# Altium PCB PC110.PcbDoc (part 2 of 24)
Units mm, origin at the board's own origin, x right, y up, seen from the top; angles counter-clockwise.
Board outline 150.05 x 107.35 mm, 10 copper layers (In2.Cu, F.Cu, B.Cu, In1.Cu, In3.Cu, In4.Cu, In5.Cu, In6.Cu, In7.Cu, In8.Cu); 936 components, 1434 nets, 4891 pads, 6088 vias.
Unrouted connection lines stored in the file: 2995.
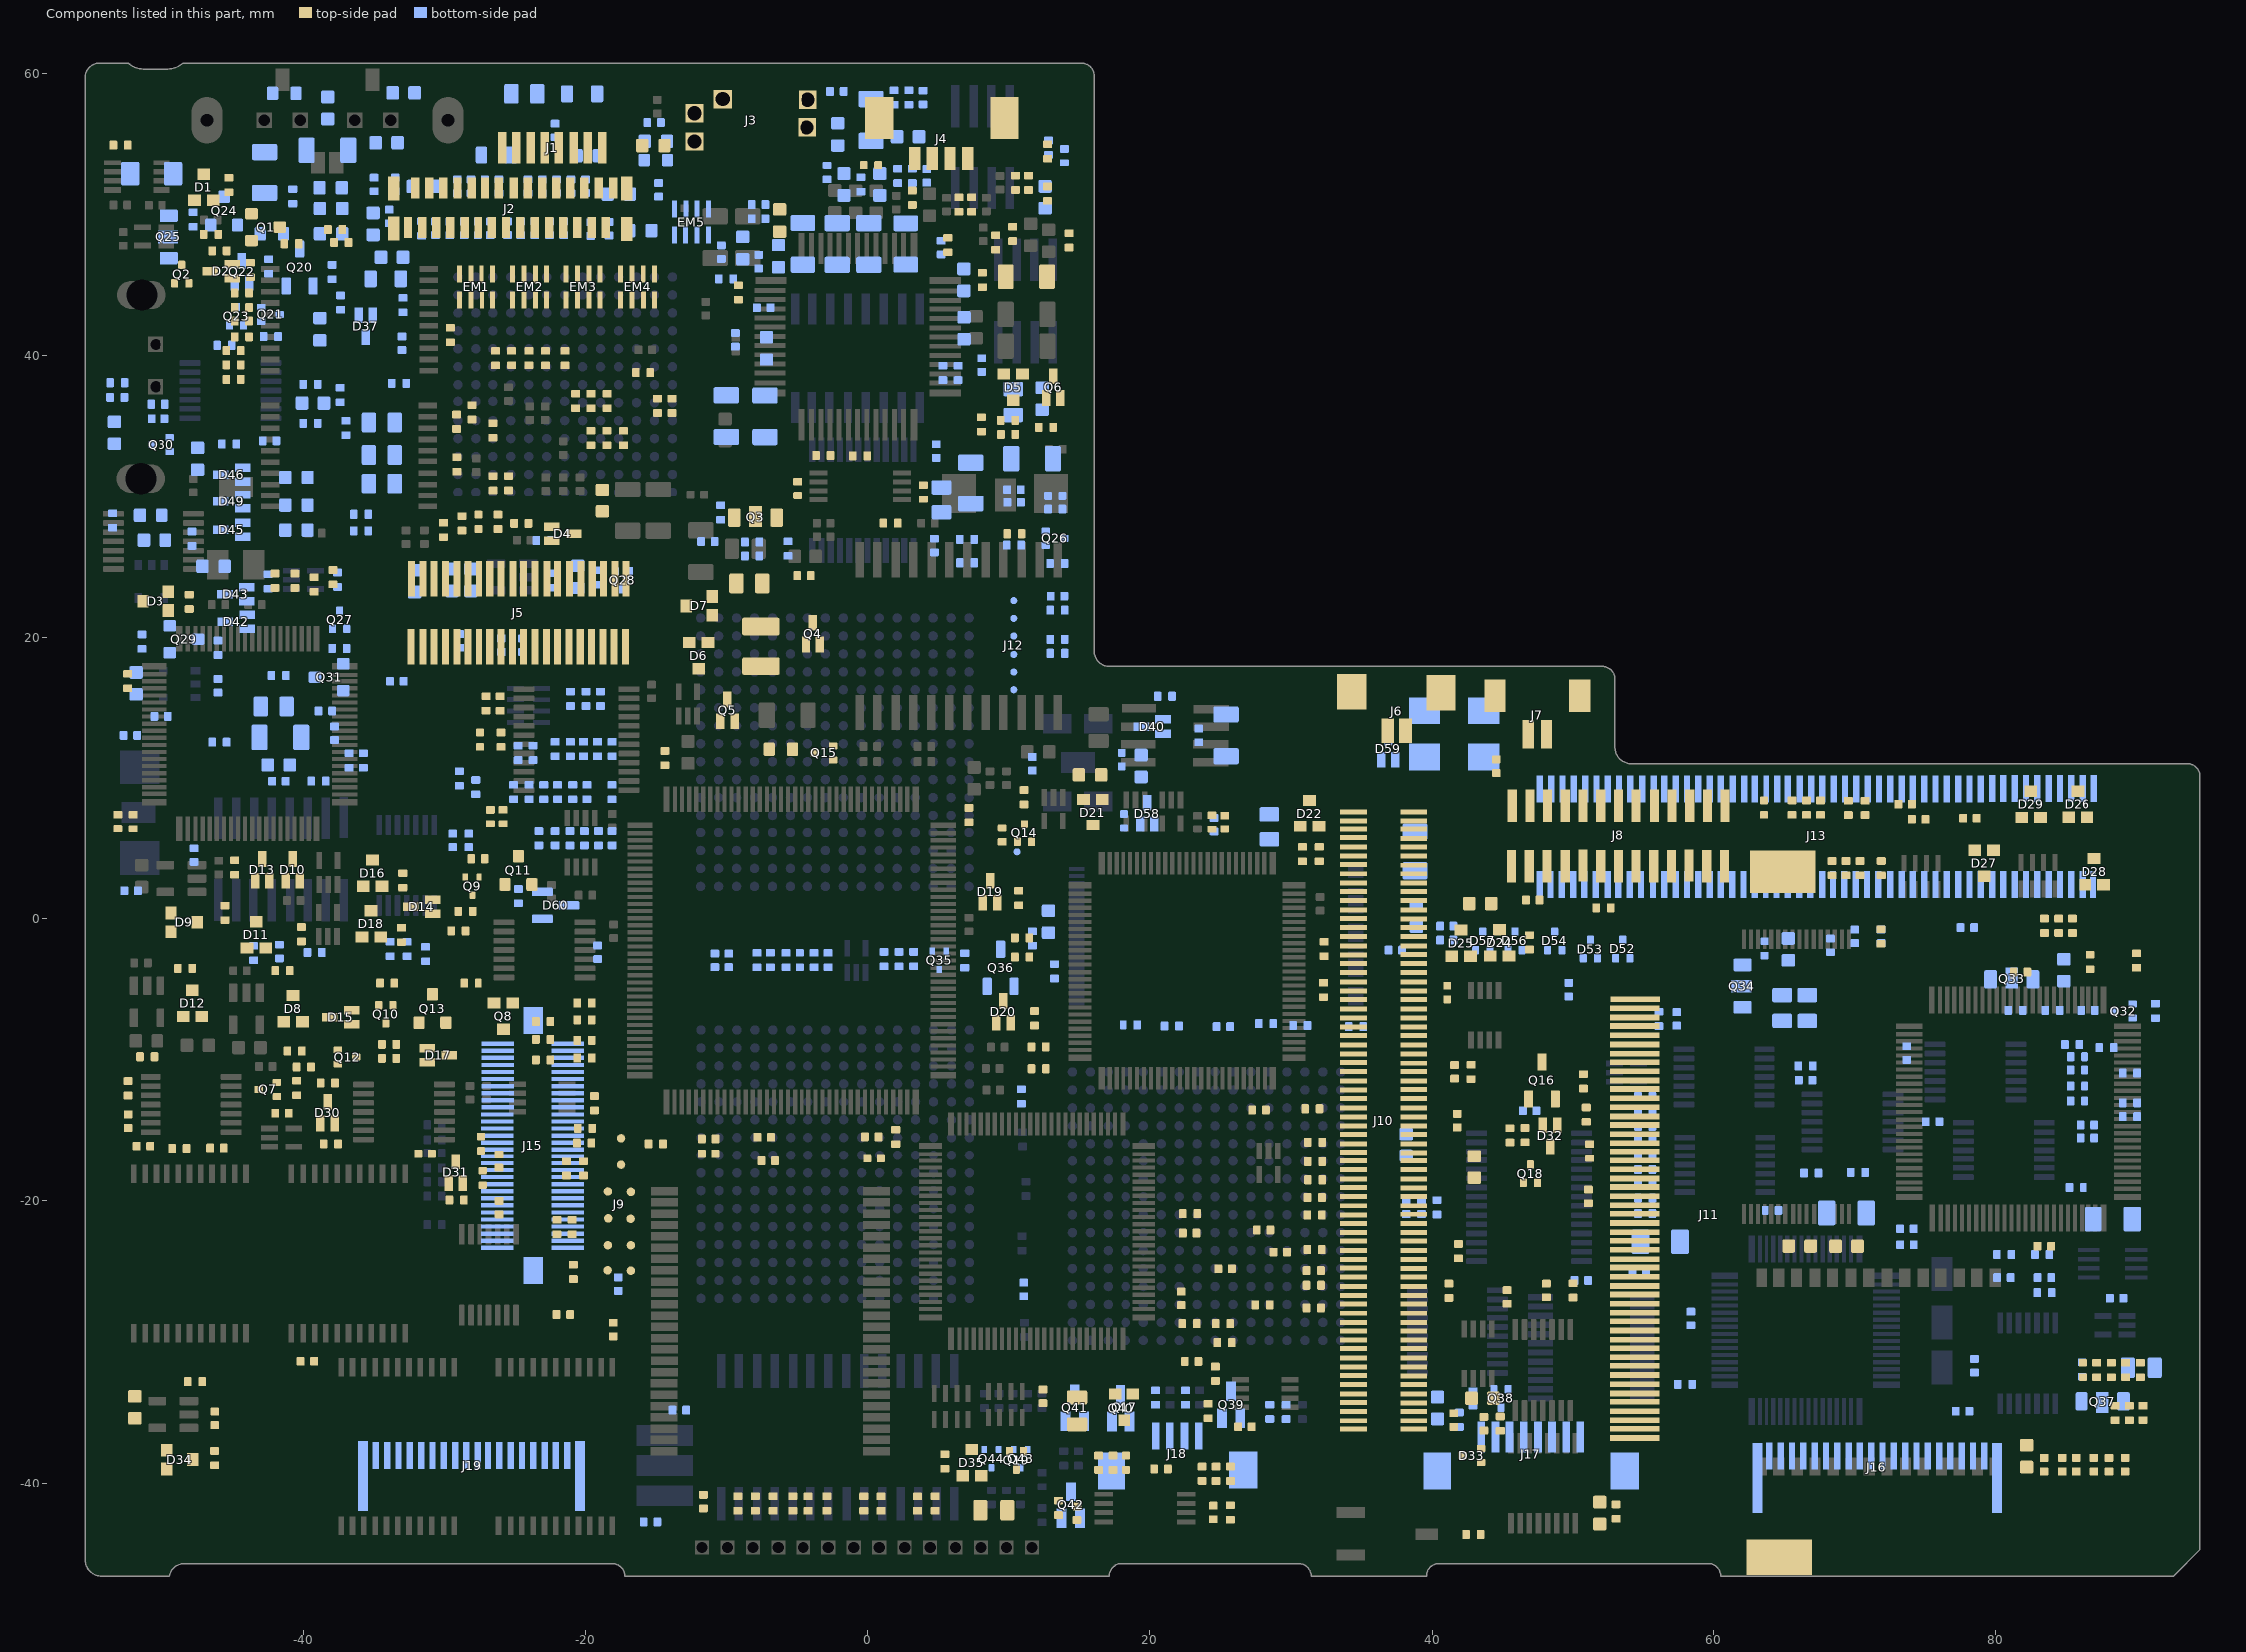
[diagram p10: the components of this part, seen from the top]

## Components (designator, comment, footprint, x,y, rotation, side; value= is the part's Value field where it differs from the comment) (continued)
C85 "Comment" C_0402_1005Metric#1 25.33,6.89 r90 top value=1nF
C86 "Comment" C_0402_1005Metric#1 47.19,1.34 r0 top value=180nF
C87 "Comment" C_0402_1005Metric#1 41.66,-10.81 r90 top value=120nF
C88 "Comment" C_0402_1005Metric#1 44.61,10.87 r90 top value=180nF
C89 "Comment" C_0603_1608Metric#1 43.47,1.09 r0 top value=470nF
C90 "Comment" C_0402_1005Metric#1 41.11,-5.2 r90 top value=120nF
C91 "Comment" C_0402_1005Metric#1 73.59,8.19 r0 top value=100nF
C92 "Comment" C_0402_1005Metric#1 74.55,7.12 r0 top value=120nF
C93 "Comment" C_0402_1005Metric#1 78.17,7.19 r0 top value=100nF
C94 "Comment" C_0402_1005Metric#1 81.75,-3.75 r0 top value=100nF
C95 "Comment" C_0402_1005Metric#1 -51.41,-16.07 r0 top value=150nF
C96 "Comment" C_0402_1005Metric#1 -41.54,-13.73 r0 top value=150nF
C97 "Comment" C_0402_1005Metric#1 -46.29,-35.38 r90 top value=100nF
C98 "Comment" C_0402_1005Metric#1 -46.14,-16.2 r0 top value=330pF
C99 "Comment" C_0402_1005Metric#1 -52.49,-14.3 r90 top value=100pF
C100 "Comment" C_0603_1608Metric#1 -52.02,-34.6 r90 top value=10nF
C101 "Comment" C_0402_1005Metric#1 -39.75,-31.35 r0 top value=180nF
C102 "Comment" C_0402_1005Metric#1 -26.13,-17.17 r90 top value=120nF
C103 "Comment" C_0402_1005Metric#1 -18.05,-29.1 r90 top value=150nF
C104 "Comment" C_0402_1005Metric#1 -26.12,-20.48 r90 top value=150nF
C105 "Comment" C_0402_1005Metric#1 -31.42,-16.63 r0 top value=150nF
C106 "Comment" C_0402_1005Metric#1 -21.57,-28.04 r0 top value=1nF
C107 "Comment" C_0402_1005Metric#1 0.47,-16.96 r0 top value=1nF
C108 "Comment" C_0402_1005Metric#1 -11.3,-16.64 r0 top value=150nF
C109 "Comment" C_0402_1005Metric#1 -11.3,-15.56 r0 top value=180nF
C110 "Comment" C_0402_1005Metric#1 -7.37,-15.44 r0 top value=1nF
C111 "Comment" C_0402_1005Metric#1 12.41,-33.83 r90 top value=1nF
C112 "Comment" C_0402_1005Metric#1 0.3,-15.41 r0 top value=150nF
C113 "Comment" C_0402_1005Metric#1 -7.09,-17.15 r0 top value=120nF
C114 "Comment" C_0402_1005Metric#1 25.36,-24.81 r180 top value=100nF
C115 "Comment" C_0402_1005Metric#1 22.99,-31.36 r180 top value=100nF
C116 "Comment" C_0402_1005Metric#1 29.26,-23.63 r180 top value=100nF
C117 "Comment" C_0402_1005Metric#1 22.85,-22.28 r180 top value=100nF
C118 "Comment" C_0805_2012Metric#1 14.82,-34.86 r90 top value=2.7uF
C119 "Comment" C_0402_1005Metric#1 28.08,-22.06 r180 top value=100nF
C120 "Comment" C_0402_1005Metric#1 27.76,-13.51 r180 top value=100nF
C121 "Comment" C_0402_1005Metric#1 26.76,-35.97 r0 top value=100nF
C122 "Comment" C_0402_1005Metric#1 22.26,-26.9 r90 top value=100nF
C123 "Comment" C_0402_1005Metric#1 43.73,-35.76 r90 top value=150nF
C124 "Comment" C_0603_1608Metric#1 43.05,-17.59 r90 top value=150nF
C125 "Comment" C_0402_1005Metric#1 41.6,-35.5 r90 top value=1nF
C126 "Comment" C_0402_1005Metric#1 41.84,-14.26 r90 top value=150nF
C127 "Comment" C_0402_1005Metric#1 45.37,-26.8 r90 top value=100nF
C128 "Comment" C_0402_1005Metric#1 48.15,-26.34 r90 top value=150nF
C129 "Comment" C_0402_1005Metric#1 51.12,-19.69 r90 top value=100nF
C130 "Comment" C_0603_1608Metric#1 43.63,-33.96 r0 top value=1uF
C131 "Comment" C_0603_1608Metric#1 82.18,-38.05 r90 top value=10nF
C132 "Comment" C_0603_1608Metric#1 69.445,-23.21 r0 top value=100nF
C133 "Comment" C_0402_1005Metric#1 83.43,-23.21 r0 top value=100nF
C134 "Comment" C_0603_1608Metric#1 66.13,-23.2 r0 top value=150nF
C135 "Comment" C_0805_2012Metric#1 8.94,-41.95 r0 top value=2.7uF
C136 "Comment" C_0402_1005Metric#1 -11.67,-41.34 r90 top value=150nF
C137 "Comment" C_0402_1005Metric#1 14.81,-42.16 r90 top value=1nF
C138 "Comment" C_0402_1005Metric#1 24.53,-42.11 r90 top value=1nF
C139 "Comment" C_0402_1005Metric#1 20.83,-38.96 r0 top value=100nF
C140 "Comment" C_0603_1608Metric#1 51.93,-42.15 r90 top value=1uF
C141 "Comment" C_0402_1005Metric#1 83.42,-38.66 r90 top value=100nF
C142 "Comment" C_0402_1005Metric#1 85.69,-38.66 r90 top value=150nF
C143 "Comment" C_0402_1005Metric#1 88.07,-38.66 r90 top value=150nF
C144 "Comment" C_0402_1005Metric#1 87,-38.66 r90 top value=100pF
C145 "Comment" C_0402_1005Metric#1 84.7,-38.66 r90 top value=100pF
C146 "Comment" C_0402_1005Metric#1 89.22,-38.66 r90 top value=100nF
C147 "Comment" C_0603_1608Metric#2 12.56,51.17 r270 bottom value=1uF
C148 "Comment" C_0402_1005Metric#2 -10.4,47.3 r270 bottom value=DNP
C149 "Comment" C_0402_1005Metric#2 8.09,39.31 r270 bottom value=100nF
C150 "Comment" C_0603_1608Metric#2 -1.66,52.08 r270 bottom value=10nF
C151 "Comment" C_0402_1005Metric#2 4.2,52.69 r270 bottom value=150nF
C152 "Comment" C_1206_3216Metric#2 -2.14,47.87 r270 bottom value=10uF
C153 "Comment" C_0603_1608Metric#2 6.82,45.33 r270 bottom value=1uF
C154 "Comment" C_0402_1005Metric#2 3.93,58.3 r270 bottom value=100pF
C155 "Comment" C_0402_1005Metric#2 5.21,47.62 r270 bottom value=150nF
C156 "Comment" C_0402_1005Metric#2 -9.41,41.09 r270 bottom value=100nF
C157 "Comment" C_0402_1005Metric#2 -7.41,43.37 r0 bottom value=150nF
C158 "Comment" C_0603_1608Metric#2 6.83,41.92 r270 bottom value=1uF
C159 "Comment" C_0402_1005Metric#2 -7.76,46.62 r270 bottom value=DNP
C160 "Comment" C_1206_3216Metric#2 -4.6,47.88 r270 bottom value=10uF
C161 "Comment" C_1206_3216Metric#2 0.1,47.87 r270 bottom value=10uF
C162 "Comment" C_1206_3216Metric#2 0.25,56.71 r270 bottom value=10uF
C163 "Comment" C_0402_1005Metric#2 -7.77,50.66 r0 bottom value=220pF
C164 "Comment" C_0603_1608Metric#2 2.87,55.53 r0 bottom value=330nF
C165 "Comment" C_0402_1005Metric#2 -2.16,58.73 r0 bottom value=DNP
C166 "Comment" C_0603_1608Metric#2 0.88,52.08 r270 bottom value=300nF
C167 "Comment" C_0402_1005Metric#2 -7.77,49.65 r0 bottom value=220pF
C168 "Comment" C_0603_1608Metric#2 -34.14,55.1 r0 bottom value=1uF
C169 "Comment" C_0402_1005Metric#2 -25.52,48.98 r270 bottom value=56pF
C170 "Comment" C_0402_1005Metric#2 -14.84,51.7 r90 bottom value=220pF
C171 "Comment" C_0402_1005Metric#2 -29.14,51.95 r270 bottom value=56pF
C172 "Comment" C_0402_1005Metric#2 -33.06,40.85 r90 bottom value=100nF
C173 "Comment" C_0402_1005Metric#2 -29.68,48.98 r270 bottom value=56pF
C174 "Comment" C_0402_1005Metric#2 -21.04,51.95 r270 bottom value=56pF
C175 "Comment" C_0402_1005Metric#2 -22.05,51.95 r270 bottom value=56pF
C176 "Comment" C_0603_1608Metric#2 -33.76,46.93 r0 bottom value=470nF
C177 "Comment" C_0402_1005Metric#2 -19.64,48.93 r90 bottom value=56pF
C178 "Comment" C_0402_1005Metric#2 -21.55,48.98 r270 bottom value=56pF
C179 "Comment" C_0402_1005Metric#2 -33.96,49.82 r270 bottom value=1nF
C180 "Comment" C_0402_1005Metric#2 -24.59,48.98 r270 bottom value=56pF
C181 "Comment" C_0402_1005Metric#2 -27.67,48.98 r270 bottom value=56pF
C182 "Comment" C_0402_1005Metric#2 -24.08,51.95 r270 bottom value=56pF
C183 "Comment" C_0402_1005Metric#2 -28.66,48.98 r270 bottom value=56pF
C184 "Comment" C_0402_1005Metric#2 -26.74,48.98 r270 bottom value=56pF
C185 "Comment" C_0402_1005Metric#2 -26.13,51.95 r270 bottom value=56pF
C186 "Comment" C_0402_1005Metric#2 -23.06,51.95 r270 bottom value=56pF
C187 "Comment" C_0402_1005Metric#2 -23.59,48.98 r270 bottom value=56pF
C188 "Comment" C_0402_1005Metric#2 -33.53,52.09 r270 bottom value=1nF
C189 "Comment" C_0402_1005Metric#2 -35.03,52.08 r270 bottom value=100nF
C190 "Comment" C_0603_1608Metric#2 -35.1,49.29 r270 bottom value=10nF
C191 "Comment" C_0402_1005Metric#2 -27.13,51.95 r270 bottom value=56pF
C192 "Comment" C_0402_1005Metric#2 -20.01,51.95 r270 bottom value=56pF
C193 "Comment" C_0402_1005Metric#2 -30.69,48.98 r270 bottom value=56pF
C194 "Comment" C_0402_1005Metric#2 -28.17,51.95 r270 bottom value=56pF
C195 "Comment" C_0402_1005Metric#2 -18.34,48.95 r90 bottom value=56pF
C196 "Comment" C_0402_1005Metric#2 -22.55,48.98 r270 bottom value=56pF
C197 "Comment" C_0603_1608Metric#2 -32.94,58.63 r0 bottom value=300nF
C198 "Comment" C_0402_1005Metric#2 -22.16,55.97 r90 bottom value=120nF
C199 "Comment" C_0402_1005Metric#2 -15.16,56.53 r0 bottom value=220pF
C200 "Comment" C_1206_3216Metric#2 -42.77,52.96 r270 bottom value=10uF
C201 "Comment" C_1206_3216Metric#2 -38.33,54.57 r0 bottom value=10uF
C202 "Comment" C_0603_1608Metric#2 -38.3,57.56 r270 bottom value=150nF
C203 "Comment" C_0402_1005Metric#2 23.5,13.05 r90 bottom value=150nF
C204 "Comment" C_1206_3216Metric#2 25.43,13.05 r90 bottom value=10uF
C205 "Comment" C_0402_1005Metric#2 13.44,22.9 r0 bottom value=150nF
C206 "Comment" C_1206_3216Metric#2 -7.32,35.69 r270 bottom value=10uF
C207 "Comment" C_0603_1608Metric#2 12.35,36.93 r270 bottom value=300nF
C208 "Comment" C_0402_1005Metric#2 10.36,30.5 r0 bottom value=1nF
C209 "Comment" C_1206_3216Metric#2 11.64,32.69 r0 bottom value=10uF
C210 "Comment" C_1206_3216Metric#2 -10.05,35.7 r270 bottom value=10uF
C211 "Comment" C_0402_1005Metric#2 10.37,29.54 r0 bottom value=150nF
C212 "Comment" C_0402_1005Metric#2 -11.35,26.76 r0 bottom value=150nF
C213 "Comment" C_0402_1005Metric#2 4.86,33.23 r90 bottom value=100nF
C214 "Comment" C_1206_3216Metric#2 7.31,30.93 r90 bottom value=10uF
C215 "Comment" C_0402_1005Metric#2 4.74,26.48 r270 bottom value=100nF
C216 "Comment" C_0402_1005Metric#2 -24.46,19.43 r90 bottom value=150nF
C217 "Comment" C_0402_1005Metric#2 -28.97,19.73 r90 bottom value=150nF
C218 "Comment" C_0603_1608Metric#2 -32.16,23.96 r270 bottom value=150nF
C219 "Comment" C_0402_1005Metric#2 -25.96,19.43 r90 bottom value=150nF
C220 "Comment" C_0402_1005Metric#2 -33.42,16.88 r0 bottom value=150nF
C221 "Comment" C_0603_1608Metric#2 -29.51,24.04 r270 bottom value=150nF
C222 "Comment" C_0603_1608Metric#2 -28.18,24.04 r270 bottom value=10nF
C223 "Comment" C_0402_1005Metric#2 -37.83,13.21 r270 bottom value=150nF
C224 "Comment" C_0603_1608Metric#2 -50.6,26.86 r0 bottom value=10nF
C225 "Comment" C_0603_1608Metric#2 -47.51,32.68 r90 bottom value=1uF
C226 "Comment" C_0603_1608Metric#2 -53.46,34.52 r90 bottom value=1uF
C227 "Comment" C_0402_1005Metric#2 -38.47,14.78 r0 bottom value=150nF
C228 "Comment" C_0402_1005Metric#2 -50.34,35.51 r0 bottom value=100pF
C229 "Comment" C_0603_1608Metric#2 -39.35,36.62 r0 bottom value=1uF
C230 "Comment" C_0402_1005Metric#2 -52.33,13.05 r180 bottom value=DNP
C231 "Comment" C_0402_1005Metric#2 -42.42,33.95 r0 bottom value=150nF
C232 "Comment" C_1206_3216Metric#2 -41.65,12.91 r0 bottom value=10uF
C233 "Comment" C_0603_1608Metric#2 -51.93,16.73 r90 bottom value=330nF
C234 "Comment" C_0402_1005Metric#2 -46.07,16.56 r270 bottom value=150nF
C235 "Comment" C_0402_1005Metric#2 70.03,-1.23 r270 bottom value=150nF
C236 "Comment" C_0402_1005Metric#2 73.7,-9.48 r90 bottom value=100nF
C237 "Comment" C_0402_1005Metric#2 71.89,-1.23 r270 bottom value=150nF
C238 "Comment" C_0603_1608Metric#2 84.81,-3.62 r270 bottom value=1uF
C239 "Comment" C_0402_1005Metric#2 77.99,-0.61 r0 bottom value=150nF
C240 "Comment" C_0603_1608Metric#2 65.33,-2.15 r90 bottom value=300nF
C241 "Comment" C_0402_1005Metric#2 68.31,-1.87 r270 bottom value=100nF
C242 "Comment" C_0402_1005Metric#2 66.55,-11.4 r180 bottom value=100nF
C243 "Comment" C_0402_1005Metric#2 57.37,-7.06 r270 bottom value=120nF
C244 "Comment" C_0402_1005Metric#2 49.73,-5 r270 bottom value=120nF
C245 "Comment" C_0603_1608Metric#2 38.89,0.22 r270 bottom value=10nF
C246 "Comment" C_0603_1608Metric#2 12.8,-0.19 r270 bottom value=150nF
C247 "Comment" C_0402_1005Metric#2 25.24,-7.61 r0 bottom value=1nF
C248 "Comment" C_0603_1608Metric#2 19.42,10.89 r270 bottom value=1uF
C249 "Comment" C_0402_1005Metric#2 37.4,-2.2 r0 bottom value=150nF
C250 "Comment" C_0402_1005Metric#2 18.02,11.34 r270 bottom value=18pF
C251 "Comment" C_0402_1005Metric#2 11.66,11.05 r270 bottom value=18pF
C252 "Comment" C_0402_1005Metric#2 -9.88,-2.93 r270 bottom value=1nF
C253 "Comment" C_0402_1005Metric#2 -10.86,-2.93 r270 bottom value=150nF
C254 "Comment" C_0402_1005Metric#2 -29.47,5.56 r270 bottom value=1nF
C255 "Comment" C_0402_1005Metric#2 -19.15,-2.36 r270 bottom value=120nF
C256 "Comment" C_0402_1005Metric#2 -28.33,5.56 r270 bottom value=150nF
C257 "Comment" C_0402_1005Metric#2 -47.76,4.52 r270 bottom value=DNP
C258 "Comment" C_0402_1005Metric#2 -41.72,-2.3 r270 bottom value=220pF
C259 "Comment" C_0603_1608Metric#2 -41.77,10.96 r0 bottom value=330nF
C260 "Comment" C_0402_1005Metric#2 -41.76,9.81 r0 bottom value=1nF
C261 "Comment" C_0402_1005Metric#2 -52.28,1.99 r0 bottom value=DNP
C262 "Comment" C_0805_2012Metric#2 90.36,-31.8 r0 bottom value=1.5uF
C263 "Comment" C_0402_1005Metric#2 88.62,-26.89 r0 bottom value=100nF
C264 "Comment" C_0402_1005Metric#2 73.72,-23.11 r0 bottom value=56pF
C265 "Comment" C_0402_1005Metric#2 64.145,-20.68 r0 bottom value=150nF
C266 "Comment" C_0402_1005Metric#2 80.575,-25.43 r0 bottom value=180pF
C267 "Comment" C_0402_1005Metric#2 73.71,-21.98 r0 bottom value=DNP
C268 "Comment" C_0402_1005Metric#2 78.49,-31.66 r90 bottom value=56pf
C269 "Comment" C_0402_1005Metric#2 83.44,-25.43 r0 bottom value=220pF
C270 "Comment" C_0402_1005Metric#2 77.65,-34.88 r0 bottom value=DNP
C271 "Comment" C_0402_1005Metric#2 75.53,-14.33 r0 bottom value=150nF
C272 "Comment" C_0402_1005Metric#2 54.72,-24.95 r0 bottom value=150nF
C273 "Comment" C_0603_1608Metric#2 38.17,-15.99 r90 bottom value=150nF
C274 "Comment" C_0402_1005Metric#2 58.37,-28.32 r90 bottom value=100nF
C275 "Comment" C_0402_1005Metric#2 50.62,-25.63 r0 bottom value=100nF
C276 "Comment" C_0402_1005Metric#2 46.97,-13.56 r0 bottom value=100nF
C277 "Comment" C_0603_1608Metric#2 40.38,-34.65 r90 bottom value=1uF
C278 "Comment" C_0402_1005Metric#2 38.17,-20.46 r90 bottom value=150nF
C279 "Comment" C_0402_1005Metric#2 39.25,-20.46 r270 bottom value=120nF
C280 "Comment" C_0402_1005Metric#2 11.05,-26.27 r270 bottom value=100nF
C281 "Comment" C_0402_1005Metric#2 -13.37,-34.8 r0 bottom value=39pF
C282 "Comment" C_0402_1005Metric#2 -17.69,-25.89 r270 bottom value=150nF
C283 "Comment" C_0402_1005Metric#2 -15.41,-42.78 r0 bottom value=39pF
D1 "Comment" 3D -47.03,51.68 r0 top value=3D
D2 "Comment" SOT-416L#1 -45.82,45.99 r90 top value=K
D3 "Comment" 3D -50.31,22.59 r90 top value=3D
D4 "Comment" SOT-416L#1 -21.64,27.26 r270 top value=N
D5 "Comment" 3D 10.26,37.95 r180 top value=3D
D6 "Comment" 3D -12.05,18.9 r180 top value=Q
D7 "Comment" 3D -11.76,22.25 r90 top value=Q
D8 "Comment" 3D -40.72,-6.54 r0 top value=DNP
D9 "Comment" 3D -48.66,-0.28 r270 top value=DNP
D10 "Comment" SOT-416L#1 -40.72,3.44 r0 top value=K
D11 "Comment" 3D -43.31,-1.33 r0 top value=DNP
D12 "Comment" 3D -47.83,-6.17 r0 top value=DNP
D13 "Comment" SOT-416L#1 -42.89,3.44 r0 top value=K
D14 "Comment" SOT-416L#1 -31.63,0.91 r90 top value=N
D15 "Comment" SOT-416L#1 -37.35,-6.9 r90 top value=N
D16 "Comment" 3D -35.09,3.04 r0 top value=3D
D17 "Comment" SOT-416L#1 -30.52,-9.69 r270 top value=N
D18 "Comment" 3D -35.19,-0.55 r0 top value=3D
D19 "Comment" SOT-416L#1 8.72,1.91 r0 top value=N
D20 "Comment" SOT-416L#1 9.67,-6.6 r0 top value=3D
D21 "Comment" 3D 15.9,7.8 r180 top value=3D
D22 "Comment" 3D 31.38,7.32 r0 top value=3D
D23 "Comment" D_0603_1608Metric#1 15.74,10.26 r180 top value=92
D24 "Comment" 3D 44.89,-1.89 r0 top value=3D
D25 "Comment" 3D 42.155,-1.905 r0 top value=3D
D26 "Comment" 3D 85.86,7.98 r0 top value=3D
D27 "Comment" 3D 79.14,4.14 r180 top value=3D
D28 "Comment" 3D 87.07,3.15 r0 top value=3D
D29 "Comment" 3D 82.53,7.97 r0 top value=3D
D30 "Comment" SOT-416L#1 -38.27,-13.71 r0 top value=N
D31 "Comment" SOT-416L#1 -29.21,-18 r0 top value=N
D32 "Comment" SOT-416L#1 48.36,-15.32 r180 top value=K
D33 "Comment" SOT-416#1 42.88,-38.01 r180 top value=N
D34 "Comment" 3D -48.97,-38.34 r270 top value=DNP
D35 "Comment" 3D 7.43,-38.71 r0 top value=3D
D36 "Comment" D_0603_1608Metric#2 -38.07,50.38 r180 bottom value=71
D37 "Comment" SOT-416L#2 -35.56,42.08 r180 bottom value=N
D38 "Comment" D_0603_1608Metric#2 -38.86,41.842 r270 bottom value=40
D39 "Comment" Diode 41.57,14.75 r180 bottom value="s.3 5F"
D40 "Comment" SOT-416L#2 20.22,13.63 r90 bottom value=N
D41 "Comment" D_0603_1608Metric#2 -20.56,24.26 r90 bottom value=24
D42 "Comment" SOT-416L#2 -44.76,21.04 r90 bottom value=N
D43 "Comment" SOT-416L#2 -44.77,22.99 r90 bottom value=N
D44 "Comment" D_0603_1608Metric#2 -46.38,25.01 r0 bottom value=83
D45 "Comment" SOT-416L#2 -45.08,27.55 r90 bottom value=N
D46 "Comment" SOT-416L#2 -45.07,31.5 r90 bottom value=N
D47 "Comment" D_0603_1608Metric#2 -50.87,28.62 r180 bottom value=24
D48 "Comment" D_0603_1608Metric#2 -40.52,27.57 r0 bottom value=A2
D49 "Comment" SOT-416L#2 -45.07,29.55 r90 bottom value=N
D50 "Comment" D_0603_1608Metric#2 -40.52,29.34 r0 bottom value=26
D51 "Comment" D_0603_1608Metric#2 -40.52,31.36 r0 bottom value=C6
D52 "Comment" SOT-416#2 53.55,-2.12 r270 bottom value=K
D53 "Comment" SOT-416#2 51.26,-2.13 r270 bottom value=K
D54 "Comment" SOT-416#2 48.74,-1.55 r270 bottom value=K
D55 "Comment" Diode 41.57,11.48 r180 bottom value="s.3 5F"
D56 "Comment" SOT-416#2 45.93,-1.55 r270 bottom value=K
D57 "Comment" SOT-416#2 43.65,-1.55 r270 bottom value=K
D58 "Comment" SOT-416L#2 19.8,7.5 r0 bottom value=K
D59 "Comment" SOT-416L#2 36.86,12.08 r0 bottom value=3D
D60 "Comment" SOT-23#1 -22.12,0.96 r180 bottom value=3D
EM1 "Comment" R-array#1 -27.81,44.76 r0 top value=R-array
EM2 "Comment" R-array#1 -23.98,44.76 r0 top value=R-array
EM3 "Comment" R-array#1 -20.2,44.76 r0 top value=R-array
EM4 "Comment" R-array#1 -16.35,44.76 r0 top value=R-array
EM5 "Comment" R-array#2 -12.49,49.35 r0 bottom value=R-array
F1 "Comment" Fuse_1206_3216Metric 38.79,4.81 r270 bottom value=0.5A
F2 "Comment" Fuse_1206_3216Metric 88.32,-21.3 r0 bottom value=1.0A
F3 "Comment" Fuse_1206_3216Metric 69.44,-20.86 r0 bottom value=0.5A
F4 "Comment" Fuse_1206_3216Metric 56.2,-22.9 r0 bottom value=0.5A
G1 "Comment" logo -45.08,-25.48 r0 bottom value=LOGO
J1 "Comment" PS2 -22.44,56.85 r0 top value=PS2
J2 "Comment" LCD_connector -25.23,50.28 r0 top value=LCD_connector
J3 "Comment" Audio-Jack -8.2,55.19 r0 top value=Audio-Jack
J4 "Comment" connector-4 5.24,55.65 r0 top value=connector-4
J5 "Comment" PSU_Connector -24.58,21.73 r0 top value=PSU_Connector
J6 "Comment" BridgeBatt 37.46,14.58 r0 top value=BridgeBatt
J7 "Comment" SPKR 47.51,15.34 r0 top value=SPKR
J8 "Comment" Modem-Connector 53.29,5.93 r0 top value=Modem-Connector
J9 "Comment" Debug-10 -17.57,-20.34 r0 top value=Debug-10
J10 "Comment" PCMCIA 36.7,-14.3 r270 top value=PCMCIA
J11 "Comment" CF-card 59.6,-20.12 r270 top value=CF-card
J12 "Comment" Debug-6 10.3,19.43 r0 bottom value=Debug-6
J13 "Comment" "Docking Port" 67.79,6.05 r0 bottom value="Docking Port"
J14 "Comment" TestPoint_Pad_D1.5mm 10.58,4.75 r0 bottom value=TestPoint_Pad_D1.5mm
J15 "Comment" "RAM Module" -23.7,-16.22 r0 bottom value="RAM Module"
J16 "Comment" Flat-20 71.59,-39.34 r0 bottom value=Flat-20
J17 "Comment" Flat-8 46.95,-38.4 r0 bottom value=Flat-8
J18 "Comment" Flat-4 21.95,-39.38 r0 bottom value=Flat-4
J19 "Comment" Flat-18 -28.3,-39.6 r0 bottom value=Flat-18
L1 "Comment" L_0603_1608Metric#1 -15.21,54.9 r0 top value=1.5uH
L2 "Comment" L_0603_1608Metric#1 -6.28,49.53 r90 top value=1.5uH
L3 "Comment" L_0603_1608Metric#1 -18.81,29.69 r90 top value=1.5uH
L4 "Comment" L_1210_3225Metric -7.6,19.35 r90 top value=68uH
L5 "Comment" L_0603_1608Metric#2 -6.36,47.01 r270 bottom value=1.5uH
L6 "Comment" L_0603_1608Metric#2 -7.21,40.49 r270 bottom value=1.5uH
L7 "Comment" L_0603_1608Metric#2 -2.1,55.69 r270 bottom value=1.5uH
L8 "Comment" L_0603_1608Metric#2 -8.89,47.587 r270 bottom value=1.5uH
L9 "Comment" L_0805_2012Metric -34.21,45.41 r0 bottom value=300nH
L10 "Comment" L_0805_2012Metric -26.34,54.23 r0 bottom value=300nH
L11 "Comment" L_0603_1608Metric#2 -17.66,51.4 r0 bottom value=1.5uH
L12 "Comment" L_0805_2012Metric -20.25,58.56 r0 bottom value=300nH
L13 "Comment" L_0603_1608Metric#2 -15.03,55.2 r0 bottom value=1.5uH
L14 "Comment" L_0603_1608Metric#2 -38.098,51.85 r0 bottom value=1.5uH
L15 "Comment" L_0603_1608Metric#2 -38.07,48.59 r0 bottom value=1.5uH
L16 "Comment" L_0603_1608Metric#2 -31.51,51.94 r0 bottom value=1.5uH
L17 "Comment" L_0603_1608Metric#2 -16.13,48.82 r0 bottom value=1.5uH
L18 "Comment" L_0603_1608Metric#2 -19.85,54.18 r0 bottom value=1.5uH
Q1 "Comment" SOT-23#2 -42.7,49.06 r0 top value=IS6
Q2 "Comment" SOT-416#1 -48.63,45.74 r90 top value=8C
Q3 "Comment" SOT-89-3#1 -7.993,30.4 r90 top value="582 B74"
Q4 "Comment" SOT-416L#1 -3.82,20.23 r0 top value=YQ
Q5 "Comment" SOT-416L#1 -9.92,14.79 r0 top value=HQ
Q6 "Comment" SOT-416L#1 13.19,37.73 r0 top value=ST3
Q7 "Comment" SOT-416#1 -42.55,-12.05 r180 top value=8C
Q8 "Comment" 3D -25.85,-6.67 r180 top value=6D
Q9 "Comment" SOT-523#1 -28.07,2.32 r270 top value=8C
Q10 "Comment" SOT-416#1 -34.2,-6.74 r270 top value=8C
Q11 "Comment" SOT-23#2 -24.75,3.44 r90 top value=IS6
Q12 "Comment" SOT-416#1 -36.94,-9.76 r0 top value=8C
Q13 "Comment" SOT-23#2 -30.9,-6.33 r90 top value=IS6
Q14 "Comment" SOT-416#1 11.1,6.1 r90 top value=8C
Q15 "Comment" SOT-416#1 -3.08,11.81 r180 top value=8B
Q16 "Comment" TSOT-23#1 47.84,-11.42 r90 top value=IS6
Q17 "Comment" 3D 18.14,-34.39 r180 top value=6D
Q18 "Comment" SOT-416#1 47.02,-18.08 r90 top value=8C
Q19 "Comment" SOT-416#1 10.53,-38.35 r270 top value=8B
Q20 "Comment" TSOT-23#2 -40.29,46.21 r270 bottom value=7C
Q21 "Comment" SOT-416#2 -42.36,42.89 r180 bottom value=8B
Q22 "Comment" SOT-416L#2 -44.42,45.87 r0 bottom value=YQ
Q23 "Comment" SOT-416#2 -44.76,42.76 r270 bottom value=8B
Q24 "Comment" SOT-23#3 -45.63,50.21 r270 bottom value=6D
Q25 "Comment" SOT-89-3#2 -51.51,48.37 r0 bottom value="BH RT"
Q26 "Comment" SOT-416#2 13.26,26.99 r180 bottom value=8C
Q27 "Comment" SOT-416#2 -37.46,21.23 r270 bottom value=8C
Q28 "Comment" SOT-416#2 -17.4,24.02 r90 bottom value=8LR
Q29 "Comment" SOT-23#3 -48.48,19.85 r180 bottom value=DNP
Q30 "Comment" SOT-416#2 -50.13,33.69 r0 bottom value=8C
Q31 "Comment" SOT-23#3 -38.21,17.17 r0 bottom value=6D
Q32 "Comment" SOT-416#2 89.098,-6.51 r0 bottom value=8B
Q33 "Comment" SOT-89-3#2 81.13,-2.32 r270 bottom value="BH RT"
Q34 "Comment" SOT-89-3#2 60.07,-4.75 r0 bottom value="BH RT"
Q35 "Comment" SOT-523#2 5.08,-2.92 r90 bottom value=8C
Q36 "Comment" TSOT-23#2 9.42,-3.45 r270 bottom value=7C
Q37 "Comment" SOT-89-3#2 87.6,-36.13 r90 bottom value="BH RT"
Q38 "Comment" SOT-416#2 44.94,-33.97 r90 bottom value=8C
Q39 "Comment" TSOT-23#3 25.78,-34.47 r0 bottom value=HQ
Q40 "Comment" TSOT-23#3 17.94,-34.71 r0 bottom value=HQ
Q41 "Comment" TSOT-23#3 14.66,-34.69 r0 bottom value=CQ
Q42 "Comment" TSOT-23#3 14.38,-41.61 r0 bottom value=CQ
Q43 "Comment" SOT-523#2 10.84,-38.23 r90 bottom value=8B
Q44 "Comment" SOT-523#2 8.77,-38.23 r90 bottom value=8B
R1 "Comment" R_0402_1005Metric#1 -44.38,44.41 r0 top value=470k
R2 "Comment" R_0402_1005Metric#1 -44.96,38.3 r0 top value=470k
R3 "Comment" R_0402_1005Metric#1 -43.78,46.03 r90 top value=131k
R4 "Comment" R_0402_1005Metric#1 -45.3,52.04 r90 top value=4.7k
R5 "Comment" R_0402_1005Metric#1 -44.96,39.33 r0 top value=470k
R6 "Comment" R_0402_1005Metric#1 -44.38,42.42 r0 top value=470k
R7 "Comment" R_0402_1005Metric#1 -44.38,41.31 r0 top value=470k
R8 "Comment" R_0402_1005Metric#1 -53.02,54.93 r0 top value=300
R9 "Comment" R_0402_1005Metric#1 -46.56,48.55 r0 top value=4.7k
R10 "Comment" R_0402_1005Metric#1 -44.38,43.38 r0 top value=470k
R11 "Comment" R_0402_1005Metric#1 -40.86,47.89 r0 top value=470k
R12 "Comment" R_0402_1005Metric#1 -45.97,47.39 r0 top value=182k
R13 "Comment" R_0402_1005Metric#1 -44.96,40.33 r0 top value=470k
R14 "Comment" R_0402_1005Metric#1 -24.01,39.8 r90 top value=10
R15 "Comment" R_0402_1005Metric#1 -29.64,41.44 r90 top value=470k
R16 "Comment" R_0402_1005Metric#1 -26.37,39.8 r90 top value=0
R17 "Comment" R_0402_1005Metric#1 -25.23,39.8 r90 top value=10
R18 "Comment" R_0402_1005Metric#1 -15.94,38.78 r0 top value=470k
R19 "Comment" R_0402_1005Metric#1 -37.78,48.89 r0 top value=470k
R20 "Comment" R_0402_1005Metric#1 -22.84,39.8 r90 top value=10
R21 "Comment" R_0402_1005Metric#1 -21.46,39.8 r90 top value=0
R22 "Comment" R_0402_1005Metric#1 -37.35,47.98 r0 top value=470k
R23 "Comment" R_0402_1005Metric#1 9.07,47.97 r90 top value=0
R24 "Comment" R_0402_1005Metric#1 5.68,47.8 r90 top value=4.7k
R25 "Comment" R_0402_1005Metric#1 7.37,50.66 r90 top value=1k
R26 "Comment" R_0402_1005Metric#1 8.13,45.33 r90 top value=2.2k
R27 "Comment" R_0402_1005Metric#1 11.39,52.2 r90 top value=470k
R28 "Comment" R_1206_3216Metric#1 11.24,45.56 r0 top value=56
R29 "Comment" R_0402_1005Metric#1 -9.2,44.45 r90 top value=1k
R30 "Comment" R_0402_1005Metric#1 3.17,51.14 r90 top value=0
R31 "Comment" R_0402_1005Metric#1 10.27,48.59 r90 top value=300
R32 "Comment" R_0402_1005Metric#1 6.47,50.66 r90 top value=2.2k
R33 "Comment" R_0402_1005Metric#1 10.46,52.2 r90 top value=470k
R34 "Comment" R_0402_1005Metric#1 0.24,53.48 r0 top value=1k
R35 "Comment" R_0402_1005Metric#1 12.73,51.43 r90 top value=100k
R36 "Comment" R_0402_1005Metric#1 14.26,48.13 r90 top value=10k
R37 "Comment" R_0402_1005Metric#1 12.74,54.48 r90 top value=100k
R38 "Comment" R_0402_1005Metric#1 -42.04,23.99 r90 top value=4.7k
R39 "Comment" R_0402_1005Metric#1 -40.63,23.99 r90 top value=47k
R40 "Comment" R_0402_1005Metric#1 -48.1,22.5 r90 top value=47k
R41 "Comment" R_0402_1005Metric#1 -39.27,23.72 r90 top value=10k
R42 "Comment" R_0402_1005Metric#1 -52.52,16.89 r270 top value=4.7k
R43 "Comment" R_0402_1005Metric#1 -28.82,28.05 r90 top value=68k
R44 "Comment" R_0402_1005Metric#1 -24.55,28.05 r0 top value=100k
R45 "Comment" R_0402_1005Metric#1 -27.51,12.75 r90 top value=100k
R46 "Comment" R_0402_1005Metric#1 -26.56,34.68 r90 top value=33
R47 "Comment" R_0402_1005Metric#1 -18.48,36.77 r90 top value=DNP
R48 "Comment" R_0402_1005Metric#1 -18.5,34.15 r90 top value=DNP
R49 "Comment" R_0402_1005Metric#1 -27.04,15.31 r90 top value=100k
R50 "Comment" R_0402_1005Metric#1 -14.92,36.43 r90 top value=DNP
R51 "Comment" R_0402_1005Metric#1 -29.18,32.27 r90 top value=0
R52 "Comment" R_0402_1005Metric#1 -26.2,28.16 r90 top value=120k
R53 "Comment" R_0402_1005Metric#1 -26.54,30.95 r90 top value=33
R54 "Comment" R_0402_1005Metric#1 -19.62,36.77 r90 top value=DNP
R55 "Comment" R_0402_1005Metric#1 -19.63,34.15 r90 top value=DNP
R56 "Comment" R_0402_1005Metric#1 -17.32,34.15 r90 top value=DNP
R57 "Comment" R_0402_1005Metric#1 -26.04,15.31 r90 top value=100k
R58 "Comment" R_0402_1005Metric#1 -29.19,35.3 r90 top value=0
R59 "Comment" R_0402_1005Metric#1 -25.98,12.75 r90 top value=100k
R60 "Comment" R_0402_1005Metric#1 -37.93,24.24 r90 top value=50k
R61 "Comment" R_0402_1005Metric#1 -28.1,35.97 r90 top value=470k
R62 "Comment" R_0402_1005Metric#1 -27.61,28.16 r90 top value=68k
R63 "Comment" R_0402_1005Metric#1 -30.12,27.58 r90 top value=68k
R64 "Comment" R_0402_1005Metric#1 -20.71,36.77 r90 top value=DNP
R65 "Comment" R_0402_1005Metric#1 -13.89,36.43 r90 top value=DNP
R66 "Comment" R_0402_1005Metric#1 -25.45,30.95 r90 top value=270
R67 "Comment" R_0402_1005Metric#1 3.96,30.3 r90 top value=0
R68 "Comment" R_0805_2012Metric#1 -8.42,23.8 r0 top value=56
R69 "Comment" R_0402_1005Metric#1 -3.12,32.91 r0 top value=2.2k
R70 "Comment" R_0402_1005Metric#1 -0.53,32.89 r0 top value=DNP
R71 "Comment" R_0402_1005Metric#1 9.95,34.41 r0 top value=10k
R72 "Comment" R_0402_1005Metric#1 -5,30.56 r90 top value=0
R73 "Comment" R_0402_1005Metric#1 1.64,28.06 r0 top value=2.2k
R74 "Comment" R_0402_1005Metric#1 12.63,34.91 r0 top value=10k
R75 "Comment" R_0402_1005Metric#1 8.06,35.11 r90 top value=0
R76 "Comment" R_0402_1005Metric#1 -4.52,24.35 r0 top value=1k
R77 "Comment" R_0402_1005Metric#1 10.39,27.31 r0 top value=470k
R78 "Comment" R_0402_1005Metric#1 9.94,35.4 r0 top value=10k
R79 "Comment" R_0402_1005Metric#1 -45.57,0.43 r90 top value=0
R80 "Comment" R_0402_1005Metric#1 -38.3,-11.59 r0 top value=470k
R81 "Comment" R_0402_1005Metric#1 -40,-10.46 r0 top value=100k
R82 "Comment" R_0402_1005Metric#1 -52.5,-11.97 r90 top value=470k
R83 "Comment" R_0402_1005Metric#1 -40.17,-1.08 r90 top value=470k
R84 "Comment" R_0402_1005Metric#1 -41.5,-3.65 r0 top value=0
R85 "Comment" R_0402_1005Metric#1 -40.65,-9.34 r0 top value=47k
R86 "Comment" R_0402_1005Metric#1 -52.14,6.93 r90 top value=4.7k
R87 "Comment" R_0402_1005Metric#1 -40.5,-11.96 r90 top value=100k
R88 "Comment" R_0402_1005Metric#1 -48.39,-3.49 r0 top value=0
R89 "Comment" R_0402_1005Metric#1 -53.22,6.94 r90 top value=4.7k
R90 "Comment" R_0402_1005Metric#1 -51.14,-9.74 r0 top value=470k
R91 "Comment" R_0402_1005Metric#1 -44.89,3.64 r90 top value=470k
R92 "Comment" R_0402_1005Metric#1 -20.08,-5.94 r0 top value=47
R93 "Comment" R_0402_1005Metric#1 -29.07,-0.84 r0 top value=47k
R94 "Comment" R_0402_1005Metric#1 -23,-7.26 r0 top value=470k
R95 "Comment" R_0402_1005Metric#1 -33.96,-9.85 r0 top value=47k
R96 "Comment" R_0402_1005Metric#1 -26.74,7.27 r90 top value=47k
R97 "Comment" R_0402_1005Metric#1 -34.1,-4.54 r0 top value=10k
R98 "Comment" R_0402_1005Metric#1 -28.13,-4.54 r0 top value=4.7k
R99 "Comment" R_0402_1005Metric#1 -28.57,0.54 r0 top value=470
R100 "Comment" R_0402_1005Metric#1 -33.96,-8.86 r0 top value=220
R101 "Comment" R_0402_1005Metric#1 -20.08,-9.83 r0 top value=33
R102 "Comment" R_0402_1005Metric#1 -23,-8.51 r0 top value=470k
R103 "Comment" R_0402_1005Metric#1 -20.08,-8.58 r0 top value=33
R104 "Comment" R_0402_1005Metric#1 -14.4,11.44 r90 top value=47k
R105 "Comment" R_0402_1005Metric#1 -23,-9.96 r0 top value=470k
R106 "Comment" R_0402_1005Metric#1 -20.08,-7.14 r0 top value=33
R107 "Comment" R_0402_1005Metric#1 -27.65,4.26 r0 top value=33k
R108 "Comment" R_0402_1005Metric#1 -25.84,7.28 r90 top value=4.7k
R109 "Comment" R_0402_1005Metric#1 -33,2.73 r90 top value=10k
R110 "Comment" R_0402_1005Metric#1 -33.09,-1.13 r90 top value=10k
R111 "Comment" R_0603_1608Metric#1 -6.19,12.07 r0 top value=100
R112 "Comment" R_0402_1005Metric#1 10.69,1.48 r90 top value=47k
R113 "Comment" R_0402_1005Metric#1 11.82,-7.02 r90 top value=470k
R114 "Comment" R_0402_1005Metric#1 9.53,5.96 r90 top value=47k
R115 "Comment" R_0402_1005Metric#1 10.94,-1.33 r0 top value=10k
R116 "Comment" R_0402_1005Metric#1 7.17,7.41 r90 top value=100k
R117 "Comment" R_0402_1005Metric#1 12.11,-9.04 r0 top value=47k
R118 "Comment" R_0402_1005Metric#1 10.94,-2.69 r0 top value=100k
R119 "Comment" R_0402_1005Metric#1 11.08,8.68 r90 top value=470k
R120 "Comment" R_0402_1005Metric#1 12.11,-10.59 r0 top value=100k
R121 "Comment" R_0402_1005Metric#1 24.44,6.89 r90 top value=100k
R122 "Comment" R_0402_1005Metric#1 30.83,4.59 r90 top value=470k
R123 "Comment" R_0402_1005Metric#1 32.02,4.59 r90 top value=470k
R124 "Comment" R_0402_1005Metric#1 32.36,-2.12 r90 top value=470k
R125 "Comment" R_0402_1005Metric#1 32.32,-5.02 r90 top value=470k
R126 "Comment" R_0402_1005Metric#1 42.83,-10.81 r90 top value=470k
R127 "Comment" R_0402_1005Metric#1 46.95,-1.65 r270 top value=470k
R128 "Comment" R_0402_1005Metric#1 52.19,0.79 r0 top value=470k
R129 "Comment" R_0402_1005Metric#1 50.77,-11.48 r90 top value=133k
R130 "Comment" R_0402_1005Metric#1 85.42,-0.48 r90 top value=470k
R131 "Comment" R_0402_1005Metric#1 71.87,-1.24 r90 top value=DNP
R132 "Comment" R_0402_1005Metric#1 67.61,7.94 r90 top value=2k
R133 "Comment" R_0402_1005Metric#1 68.43,3.59 r90 top value=2k
R134 "Comment" R_0402_1005Metric#1 86.72,-3.04 r90 top value=10k
R135 "Comment" R_0402_1005Metric#1 71.9,3.59 r90 top value=470k
R136 "Comment" R_0402_1005Metric#1 65.6,7.94 r90 top value=1k
R137 "Comment" R_0402_1005Metric#1 63.58,7.94 r90 top value=2k
R138 "Comment" R_0402_1005Metric#1 70.41,3.59 r90 top value=1k
R139 "Comment" R_0402_1005Metric#1 84.45,-0.48 r90 top value=470k
R140 "Comment" R_0402_1005Metric#1 69.57,7.93 r90 top value=1k
R141 "Comment" R_0402_1005Metric#1 66.61,7.94 r90 top value=1k
R142 "Comment" R_0402_1005Metric#1 69.4,3.59 r90 top value=1k
R143 "Comment" R_0402_1005Metric#1 70.76,7.93 r90 top value=10k
R144 "Comment" R_0402_1005Metric#1 83.44,-0.48 r90 top value=470k
R145 "Comment" R_0402_1005Metric#1 90.02,-2.94 r90 top value=DNP
R146 "Comment" R_0402_1005Metric#1 -48.8,-16.24 r0 top value=470k
R147 "Comment" R_0402_1005Metric#1 -47.7,-32.79 r0 top value=470k
R148 "Comment" R_0402_1005Metric#1 -20.87,-25.02 r90 top value=470k
R149 "Comment" R_0402_1005Metric#1 -15.04,-15.91 r0 top value=33
R150 "Comment" R_0402_1005Metric#1 -20.14,-17.7 r90 top value=100k
R151 "Comment" R_0402_1005Metric#1 -27.31,-18.38 r90 top value=100k
R152 "Comment" R_0402_1005Metric#1 -29.19,-19.94 r0 top value=470k
R153 "Comment" R_0402_1005Metric#1 -20.95,-21.86 r90 top value=100k
R154 "Comment" R_0402_1005Metric#1 -21.36,-17.7 r90 top value=33
R155 "Comment" R_0402_1005Metric#1 -22.03,-21.86 r90 top value=100k
R156 "Comment" R_0402_1005Metric#1 -38.09,-15.9 r0 top value=470k
R157 "Comment" R_0402_1005Metric#1 -27.43,-15.9 r90 top value=100k
R158 "Comment" R_0402_1005Metric#1 -20.05,-14.8 r0 top value=470k
R159 "Comment" R_0402_1005Metric#1 -20.1,-15.85 r0 top value=33
R160 "Comment" R_0402_1005Metric#1 -19.38,-13.03 r90 top value=470k
R161 "Comment" R_0402_1005Metric#1 2,-15.41 r90 top value=470k
R162 "Comment" R_0402_1005Metric#1 22.88,-20.91 r0 top value=470k
R163 "Comment" R_0402_1005Metric#1 31.7,-19.77 r0 top value=10k
R164 "Comment" R_0402_1005Metric#1 31.72,-17.21 r0 top value=10k
R165 "Comment" R_0402_1005Metric#1 22.85,-28.69 r0 top value=47k
R166 "Comment" R_0402_1005Metric#1 31.63,-24.94 r0 top value=10k
R167 "Comment" R_0402_1005Metric#1 24.67,-32.23 r90 top value=100k
R168 "Comment" R_0402_1005Metric#1 31.69,-21 r0 top value=10k
R169 "Comment" R_0402_1005Metric#1 31.69,-23.45 r0 top value=10k
R170 "Comment" R_0402_1005Metric#1 31.63,-25.97 r0 top value=10k
R171 "Comment" R_0402_1005Metric#1 24.16,-34.86 r90 top value=47k
R172 "Comment" R_0402_1005Metric#1 31.53,-13.42 r0 top value=10k
R173 "Comment" R_0402_1005Metric#1 25.32,-30.02 r0 top value=470k
R174 "Comment" R_0402_1005Metric#1 31.72,-15.79 r0 top value=10k
R175 "Comment" R_0402_1005Metric#1 28.01,-27.36 r0 top value=10k
R176 "Comment" R_0402_1005Metric#1 31.72,-18.51 r0 top value=10k
R177 "Comment" R_0402_1005Metric#1 31.63,-27.57 r0 top value=47k
R178 "Comment" R_0402_1005Metric#1 25.21,-28.69 r0 top value=10k
R179 "Comment" R_0402_1005Metric#1 41.25,-26.36 r90 top value=10k
R180 "Comment" R_0402_1005Metric#1 46.64,-15.29 r90 top value=180k
R181 "Comment" R_0402_1005Metric#1 41.93,-23.56 r90 top value=10k
R182 "Comment" R_0402_1005Metric#1 44.89,-35.76 r90 top value=470k
R183 "Comment" R_0402_1005Metric#1 50.97,-13.84 r90 top value=470k
R184 "Comment" R_0402_1005Metric#1 51.21,-16.44 r90 top value=DNP
R185 "Comment" R_0402_1005Metric#1 45.57,-15.3 r90 top value=4.7k
R186 "Comment" R_0402_1005Metric#1 50.04,-26.33 r90 top value=470k
R187 "Comment" R_0402_1005Metric#1 87.2,-31.96 r90 top value=470k
R188 "Comment" R_0402_1005Metric#1 88.51,-35 r90 top value=10k
R189 "Comment" R_0402_1005Metric#1 88.24,-31.96 r90 top value=470k
R190 "Comment" R_0402_1005Metric#1 86.2,-31.96 r90 top value=470k
R191 "Comment" R_0402_1005Metric#1 89.25,-31.96 r90 top value=470k
R192 "Comment" R_0402_1005Metric#1 90.48,-35 r90 top value=10k
R193 "Comment" R_0402_1005Metric#1 89.51,-35 r90 top value=10k
R194 "Comment" R_0402_1005Metric#1 90.29,-31.96 r90 top value=470k
R195 "Comment" R_0402_1005Metric#1 -46.3,-38.2 r90 top value=0
R196 "Comment" R_0402_1005Metric#1 -9.24,-41.48 r90 top value=47k
R197 "Comment" R_0402_1005Metric#1 -0.26,-41.48 r90 top value=47k
R198 "Comment" R_0402_1005Metric#1 -5.35,-41.48 r90 top value=10k
R199 "Comment" R_0402_1005Metric#1 3.54,-41.48 r90 top value=DNP
R200 "Comment" R_0402_1005Metric#1 5.47,-38.44 r90 top value=47k
R201 "Comment" R_0402_1005Metric#1 -4.2,-41.48 r90 top value=100k
R202 "Comment" R_0402_1005Metric#1 4.79,-41.48 r90 top value=DNP
R203 "Comment" R_0402_1005Metric#1 -8,-41.48 r90 top value=10k
R204 "Comment" R_0402_1005Metric#1 0.96,-41.48 r90 top value=47k
R205 "Comment" R_0402_1005Metric#1 -2.87,-41.48 r90 top value=100k
R206 "Comment" R_0402_1005Metric#1 -6.74,-41.48 r90 top value=47k
R207 "Comment" R_0402_1005Metric#1 18.32,-38.52 r90 top value=120k
R208 "Comment" R_0402_1005Metric#1 23.74,-39.3 r90 top value=120k
R209 "Comment" R_0402_1005Metric#1 24.72,-39.3 r90 top value=100k
R210 "Comment" R_0402_1005Metric#1 17.37,-38.52 r90 top value=100K
R211 "Comment" R_0402_1005Metric#1 16.35,-38.52 r90 top value=120k
R212 "Comment" R_0402_1005Metric#1 25.73,-42.11 r90 top value=100k
R213 "Comment" R_0402_1005Metric#1 25.74,-39.3 r90 top value=120k
R214 "Comment" R_0402_1005Metric#1 13.5,-41.78 r90 top value=100k
R215 "Comment" R_0402_1005Metric#1 53.08,-42.05 r90 top value=470k
R216 "Comment" R_0402_1005Metric#1 42.99,-43.67 r0 top value=470k
R217 "Comment" R_0402_1005Metric#2 13.92,54.15 r270 bottom value=470k
R218 "Comment" R_0402_1005Metric#2 12.8,54.75 r270 bottom value=470k
R219 "Comment" R_0402_1005Metric#2 5.33,38.76 r90 bottom value=100k
R220 "Comment" R_0402_1005Metric#2 1.88,58.3 r270 bottom value=10k
R221 "Comment" R_0402_1005Metric#2 -2.85,52.95 r270 bottom value=0
R222 "Comment" R_0402_1005Metric#2 3.17,52.69 r270 bottom value=6.8k
R223 "Comment" R_0402_1005Metric#2 6.41,38.76 r270 bottom value=100k
R224 "Comment" R_0402_1005Metric#2 -0.46,52.08 r270 bottom value=470k
R225 "Comment" R_0402_1005Metric#2 2.14,52.69 r270 bottom value=6.8k
R226 "Comment" R_1206_3216Metric#2 2.71,47.87 r270 bottom value=120
R227 "Comment" R_0402_1005Metric#2 2.93,58.3 r270 bottom value=10k
R228 "Comment" R_0402_1005Metric#2 -10.07,45.41 r180 bottom value=470k
R229 "Comment" R_0402_1005Metric#2 -32.99,43.55 r90 bottom value=470k
R230 "Comment" R_0805_2012Metric#2 -24.33,58.56 r0 bottom value=0
R231 "Comment" R_0603_1608Metric#2 -15.03,53.84 r0 bottom value=0
R232 "Comment" R_0402_1005Metric#2 -37.39,43.72 r90 bottom value=10k
R233 "Comment" R_0402_1005Metric#2 -37.99,45.88 r90 bottom value=470k
R234 "Comment" R_0402_1005Metric#2 -31.66,48.97 r270 bottom value=100k
R235 "Comment" R_0402_1005Metric#2 -45.61,40.71 r0 bottom value=470k
R236 "Comment" R_0402_1005Metric#2 -40.78,51.24 r270 bottom value=470
R237 "Comment" R_0402_1005Metric#2 -42.33,41.33 r0 bottom value=10k
R238 "Comment" R_0603_1608Metric#2 -41.38,58.59 r0 bottom value=56
R239 "Comment" R_0603_1608Metric#2 -42.26,48.59 r0 bottom value=56
R240 "Comment" R_0402_1005Metric#2 -42.48,46.28 r90 bottom value=47k
R241 "Comment" R_1206_3216Metric_Pad1.30x1.75mm_HandSolder -50.79,52.88 r0 bottom value=8.2
R242 "Comment" R_0402_1005Metric#2 -47.82,49.61 r90 bottom value=7.5k
R243 "Comment" R_0402_1005Metric#2 13.28,30.03 r0 bottom value=470k
R244 "Comment" R_0402_1005Metric#2 13.44,21.91 r0 bottom value=470k
R245 "Comment" R_0402_1005Metric#2 13.28,29.05 r0 bottom value=470k
R246 "Comment" R_0402_1005Metric#2 13.44,19.84 r0 bottom value=47k
R247 "Comment" R_0402_1005Metric#2 21.1,15.82 r180 bottom value=470k
R248 "Comment" R_0402_1005Metric#2 13.43,25.21 r0 bottom value=470k
R249 "Comment" R_0402_1005Metric#2 13.44,18.86 r0 bottom value=47k
R250 "Comment" R_0805_2012Metric#2 5.23,29.74 r90 bottom value=0
R251 "Comment" R_0402_1005Metric#2 7.04,26.92 r0 bottom value=33
R252 "Comment" R_0402_1005Metric#2 -8.22,25.75 r0 bottom value=33
R253 "Comment" R_0402_1005Metric#2 -10.45,28.82 r270 bottom value=DNP
R254 "Comment" R_0402_1005Metric#2 10.36,26.51 r0 bottom value=47k
R255 "Comment" R_0402_1005Metric#2 -8.22,26.72 r0 bottom value=33
R256 "Comment" R_0805_2012Metric#2 10.31,36.69 r90 bottom value=100
R257 "Comment" R_0402_1005Metric#2 7.04,25.26 r0 bottom value=33
R258 "Comment" R_0402_1005Metric#2 -5.69,26.26 r270 bottom value=10k
R259 "Comment" R_0402_1005Metric#2 -33.27,38.02 r0 bottom value=470k
R260 "Comment" R_0402_1005Metric#2 -22.97,26.83 r0 bottom value=133k
R261 "Comment" R_0402_1005Metric#2 -21.07,15.64 r270 bottom value=33
R262 "Comment" R_0402_1005Metric#2 -37.48,19.2 r0 bottom value=470k
R263 "Comment" R_0402_1005Metric#2 -35.95,27.52 r0 bottom value=4.7k
R264 "Comment" R_0805_2012Metric#2 -34.48,32.95 r0 bottom value=150
R265 "Comment" R_0402_1005Metric#2 -37.43,37.19 r90 bottom value=4.7k
R266 "Comment" R_0402_1005Metric#2 -19.1,24.21 r270 bottom value=50k
R267 "Comment" R_0805_2012Metric#2 -34.48,35.25 r0 bottom value=150
R268 "Comment" R_0402_1005Metric#2 -37.61,24.06 r270 bottom value=100k
R269 "Comment" R_0402_1005Metric#2 -37.02,34.86 r90 bottom value=470k
R270 "Comment" R_0402_1005Metric#2 -35.95,28.69 r0 bottom value=4.7k
R271 "Comment" R_0402_1005Metric#2 -22.49,24.01 r270 bottom value=DNP
R272 "Comment" R_0402_1005Metric#2 -18.95,15.64 r270 bottom value=33
R273 "Comment" R_0805_2012Metric#2 -34.48,30.92 r0 bottom value=150
R274 "Comment" R_0402_1005Metric#2 -19.97,15.64 r270 bottom value=33
R275 "Comment" R_0402_1005Metric#2 -41.78,17.29 r0 bottom value=4.7k
R276 "Comment" R_0402_1005Metric#2 -45.28,33.73 r0 bottom value=33k
R277 "Comment" R_0402_1005Metric#2 -53.26,37.03 r0 bottom value=200k
R278 "Comment" R_0402_1005Metric#2 -47.91,26.96 r270 bottom value=470k
R279 "Comment" R_0402_1005Metric#2 -39.53,35.19 r0 bottom value=4.7k
R280 "Comment" R_0402_1005Metric#2 -53.25,38.06 r0 bottom value=47k
R281 "Comment" R_0402_1005Metric#2 -53.59,28.25 r90 bottom value=10k
R282 "Comment" R_0402_1005Metric#2 -50.34,36.54 r0 bottom value=470k
R283 "Comment" R_0402_1005Metric#2 -50.12,14.4 r0 bottom value=4.7k
R284 "Comment" R_0805_2012Metric#2 -42.13,15.1 r0 bottom value=10
R285 "Comment" R_0402_1005Metric#2 -46.07,19.25 r270 bottom value=0
R286 "Comment" R_0402_1005Metric#2 -39.53,37.95 r0 bottom value=22k
R287 "Comment" R_0402_1005Metric#2 -42.52,23.93 r270 bottom value=470k
R288 "Comment" R_0402_1005Metric#2 -51.5,19.68 r90 bottom value=47k
R289 "Comment" R_0402_1005Metric#2 91.36,-6.5 r270 bottom value=10k
R290 "Comment" R_0402_1005Metric#2 89.55,-10.9 r0 bottom value=DNP
R291 "Comment" R_0402_1005Metric#2 86.55,-6.46 r0 bottom value=220
R292 "Comment" R_0805_2012Metric#2 66.67,-6.3 r270 bottom value=DNP
R293 "Comment" R_0402_1005Metric#2 81.39,-6.46 r0 bottom value=22k
R294 "Comment" R_0402_1005Metric#2 63.62,-2.08 r270 bottom value=1.2k
R295 "Comment" R_0402_1005Metric#2 85.4,-8.88 r0 bottom value=0
R296 "Comment" R_0402_1005Metric#2 85.8,-9.74 r0 bottom value=DNP
R297 "Comment" R_0402_1005Metric#2 84.01,-6.46 r0 bottom value=220
R298 "Comment" R_0402_1005Metric#2 85.8,-11.82 r0 bottom value=DNP
R299 "Comment" R_0402_1005Metric#2 85.8,-10.68 r0 bottom value=0
R300 "Comment" R_0805_2012Metric#2 64.89,-6.292 r270 bottom value=0
R301 "Comment" R_0402_1005Metric#2 87.89,-9.1 r0 bottom value=DNP
R302 "Comment" R_0402_1005Metric#2 66.55,-10.39 r0 bottom value=470k
R303 "Comment" R_0402_1005Metric#2 41.07,-0.51 r0 bottom value=470k
R304 "Comment" R_0402_1005Metric#2 55.14,-12.56 r0 bottom value=4.7k
R305 "Comment" R_0402_1005Metric#2 41.07,-1.5 r0 bottom value=470k
R306 "Comment" R_0402_1005Metric#2 56.1,-7.06 r270 bottom value=470k
R307 "Comment" R_0402_1005Metric#2 18.63,-7.49 r0 bottom value=470k
R308 "Comment" R_0402_1005Metric#2 18.18,6.98 r270 bottom value=10
R309 "Comment" R_0402_1005Metric#2 28.26,-7.4 r0 bottom value=470k
R310 "Comment" R_0402_1005Metric#2 24.58,6.7 r270 bottom value=100k
R311 "Comment" R_0402_1005Metric#2 30.68,-7.53 r0 bottom value=470k
R312 "Comment" R_0402_1005Metric#2 34.62,-7.61 r0 bottom value=47k
R313 "Comment" R_0805_2012Metric#2 28.49,6.55 r270 bottom value=300
R314 "Comment" R_0402_1005Metric#2 13.22,-3.7 r270 bottom value=470k
R315 "Comment" R_0402_1005Metric#2 21.59,-7.57 r0 bottom value=470k
R316 "Comment" R_0402_1005Metric#2 1.17,-2.84 r270 bottom value=1k
R317 "Comment" R_0402_1005Metric#2 -5.82,-2.91 r270 bottom value=33
R318 "Comment" R_0402_1005Metric#2 -4.82,-2.91 r270 bottom value=33
R319 "Comment" R_0402_1005Metric#2 -2.78,-2.91 r270 bottom value=1k
R320 "Comment" R_0402_1005Metric#2 6.88,-2.93 r270 bottom value=10k
R321 "Comment" R_0402_1005Metric#2 3.27,-2.84 r270 bottom value=100k
R322 "Comment" R_0402_1005Metric#2 -7.88,-2.91 r270 bottom value=33
R323 "Comment" R_0402_1005Metric#2 2.23,-2.84 r270 bottom value=1k
R324 "Comment" R_0402_1005Metric#2 -6.94,-2.91 r270 bottom value=33
R325 "Comment" R_0402_1005Metric#2 10.88,-12.56 r270 bottom value=10k
R326 "Comment" R_0402_1005Metric#2 -3.77,-2.91 r90 bottom value=33
R327 "Comment" R_0402_1005Metric#2 11.67,-1.38 r270 bottom value=470k
R328 "Comment" R_0402_1005Metric#2 -22.96,9.04 r270 bottom value=4.7k
R329 "Comment" R_0402_1005Metric#2 -19.91,9.04 r270 bottom value=33
R330 "Comment" R_0402_1005Metric#2 -24.77,11.82 r270 bottom value=4.7k
R331 "Comment" R_0402_1005Metric#2 -23.31,5.71 r270 bottom value=4.7k
R332 "Comment" R_0402_1005Metric#2 -35.79,11.28 r270 bottom value=33
R333 "Comment" R_0402_1005Metric#2 -20.91,9.04 r270 bottom value=33
R334 "Comment" R_0402_1005Metric#2 -20.15,12.09 r270 bottom value=33
R335 "Comment" R_0402_1005Metric#2 -21.07,12.09 r270 bottom value=33
R336 "Comment" R_0402_1005Metric#2 -25.09,9.04 r270 bottom value=4.7k
R337 "Comment" R_0402_1005Metric#2 -19.16,12.09 r270 bottom value=33
R338 "Comment" R_0402_1005Metric#2 -20.09,5.71 r270 bottom value=33
R339 "Comment" R_0402_1005Metric#2 -23.99,9.04 r270 bottom value=4.7k
R340 "Comment" R_0402_1005Metric#2 -36.79,11.28 r270 bottom value=33
R341 "Comment" R_0402_1005Metric#2 -32.69,-2.13 r270 bottom value=33
R342 "Comment" R_0402_1005Metric#2 -18.12,5.71 r270 bottom value=33
R343 "Comment" R_0402_1005Metric#2 -18.13,9.04 r270 bottom value=33
R344 "Comment" R_0402_1005Metric#2 -29,10 r270 bottom value=DNP
R345 "Comment" R_0402_1005Metric#2 -21.1,5.71 r270 bottom value=33
R346 "Comment" R_0402_1005Metric#2 -19.09,5.71 r270 bottom value=33
R347 "Comment" R_0402_1005Metric#2 -18.13,12.09 r270 bottom value=33
R348 "Comment" R_0402_1005Metric#2 -33.89,-2.13 r270 bottom value=33
R349 "Comment" R_0402_1005Metric#2 -24.76,1.61 r270 bottom value=100k
R350 "Comment" R_0402_1005Metric#2 -31.39,-2.48 r270 bottom value=33
R351 "Comment" R_0402_1005Metric#2 -22.15,5.71 r270 bottom value=4.7k
R352 "Comment" R_0402_1005Metric#2 -21.98,9.04 r270 bottom value=33
R353 "Comment" R_0402_1005Metric#2 -27.84,9.39 r270 bottom value=56
R354 "Comment" R_0402_1005Metric#2 -22.16,12.09 r270 bottom value=4.7k
R355 "Comment" R_0402_1005Metric#2 -23.72,11.82 r270 bottom value=4.7k
R356 "Comment" R_0402_1005Metric#2 -45.97,12.57 r0 bottom value=47k
R357 "Comment" R_0402_1005Metric#2 -39.23,-2.36 r0 bottom value=33
R358 "Comment" R_0402_1005Metric#2 -38.96,9.82 r0 bottom value=47
R359 "Comment" R_0402_1005Metric#2 -43.55,-2.41 r90 bottom value=33
R360 "Comment" R_0402_1005Metric#2 89.55,-13 r0 bottom value=470k
R361 "Comment" R_0402_1005Metric#2 89.55,-13.98 r0 bottom value=470k
R362 "Comment" R_0402_1005Metric#2 80.59,-23.8 r0 bottom value=2k
R363 "Comment" R_0402_1005Metric#2 83.45,-26.49 r0 bottom value=100k
R364 "Comment" R_0402_1005Metric#2 70.25,-17.99 r0 bottom value=DNP
R365 "Comment" R_0402_1005Metric#2 85.8,-12.87 r0 bottom value=10k
R366 "Comment" R_0402_1005Metric#2 86.51,-14.57 r0 bottom value=0
R367 "Comment" R_0402_1005Metric#2 86.51,-15.49 r0 bottom value=0
R368 "Comment" R_0402_1005Metric#2 86.12,-31.92 r270 bottom value=1.5k
R369 "Comment" R_0402_1005Metric#2 85.72,-19.06 r180 bottom value=22k
R370 "Comment" R_0402_1005Metric#2 66.95,-18.04 r0 bottom value=0
R371 "Comment" R_0402_1005Metric#2 83.28,-23.8 r0 bottom value=2k
R372 "Comment" R_0402_1005Metric#2 57.95,-32.98 r0 bottom value=100k
R373 "Comment" R_0402_1005Metric#2 55.14,-16.77 r0 bottom value=4.7k
R374 "Comment" R_0402_1005Metric#2 55.14,-17.78 r0 bottom value=4.7k
R375 "Comment" R_0402_1005Metric#2 55.14,-19.82 r0 bottom value=4.7k
R376 "Comment" R_0402_1005Metric#2 55.14,-18.79 r0 bottom value=4.7k
R377 "Comment" R_0402_1005Metric#2 55.14,-14.66 r0 bottom value=4.7k
R378 "Comment" R_0402_1005Metric#2 55.14,-15.64 r0 bottom value=4.7k
R379 "Comment" R_0402_1005Metric#2 40.34,-20.46 r90 bottom value=470k
R380 "Comment" R_0402_1005Metric#2 55.14,-20.89 r0 bottom value=4.7k
R381 "Comment" R_0402_1005Metric#2 55.14,-13.67 r0 bottom value=4.7k
R382 "Comment" R_0402_1005Metric#2 42.96,-33.97 r270 bottom value=50k
R383 "Comment" R_0402_1005Metric#2 41.99,-35.48 r270 bottom value=33k
R384 "Comment" R_0402_1005Metric#2 28.52,-34.92 r270 bottom value=10k
R385 "Comment" R_0402_1005Metric#2 20.44,-33.91 r270 bottom value=47k
R386 "Comment" R_0402_1005Metric#2 22.56,-33.91 r270 bottom value=1k
R387 "Comment" R_0402_1005Metric#2 29.68,-34.92 r270 bottom value=DNP